# Altium PCB BatteryIot.PcbDoc (part 2 of 3)
Units mm, origin at the board's own origin, x right, y up, seen from the top; angles counter-clockwise.
Board outline 114 x 84 mm, 2 copper layers (Top Layer, Bottom Layer); 162 components, 97 nets, 548 pads, 135 vias.
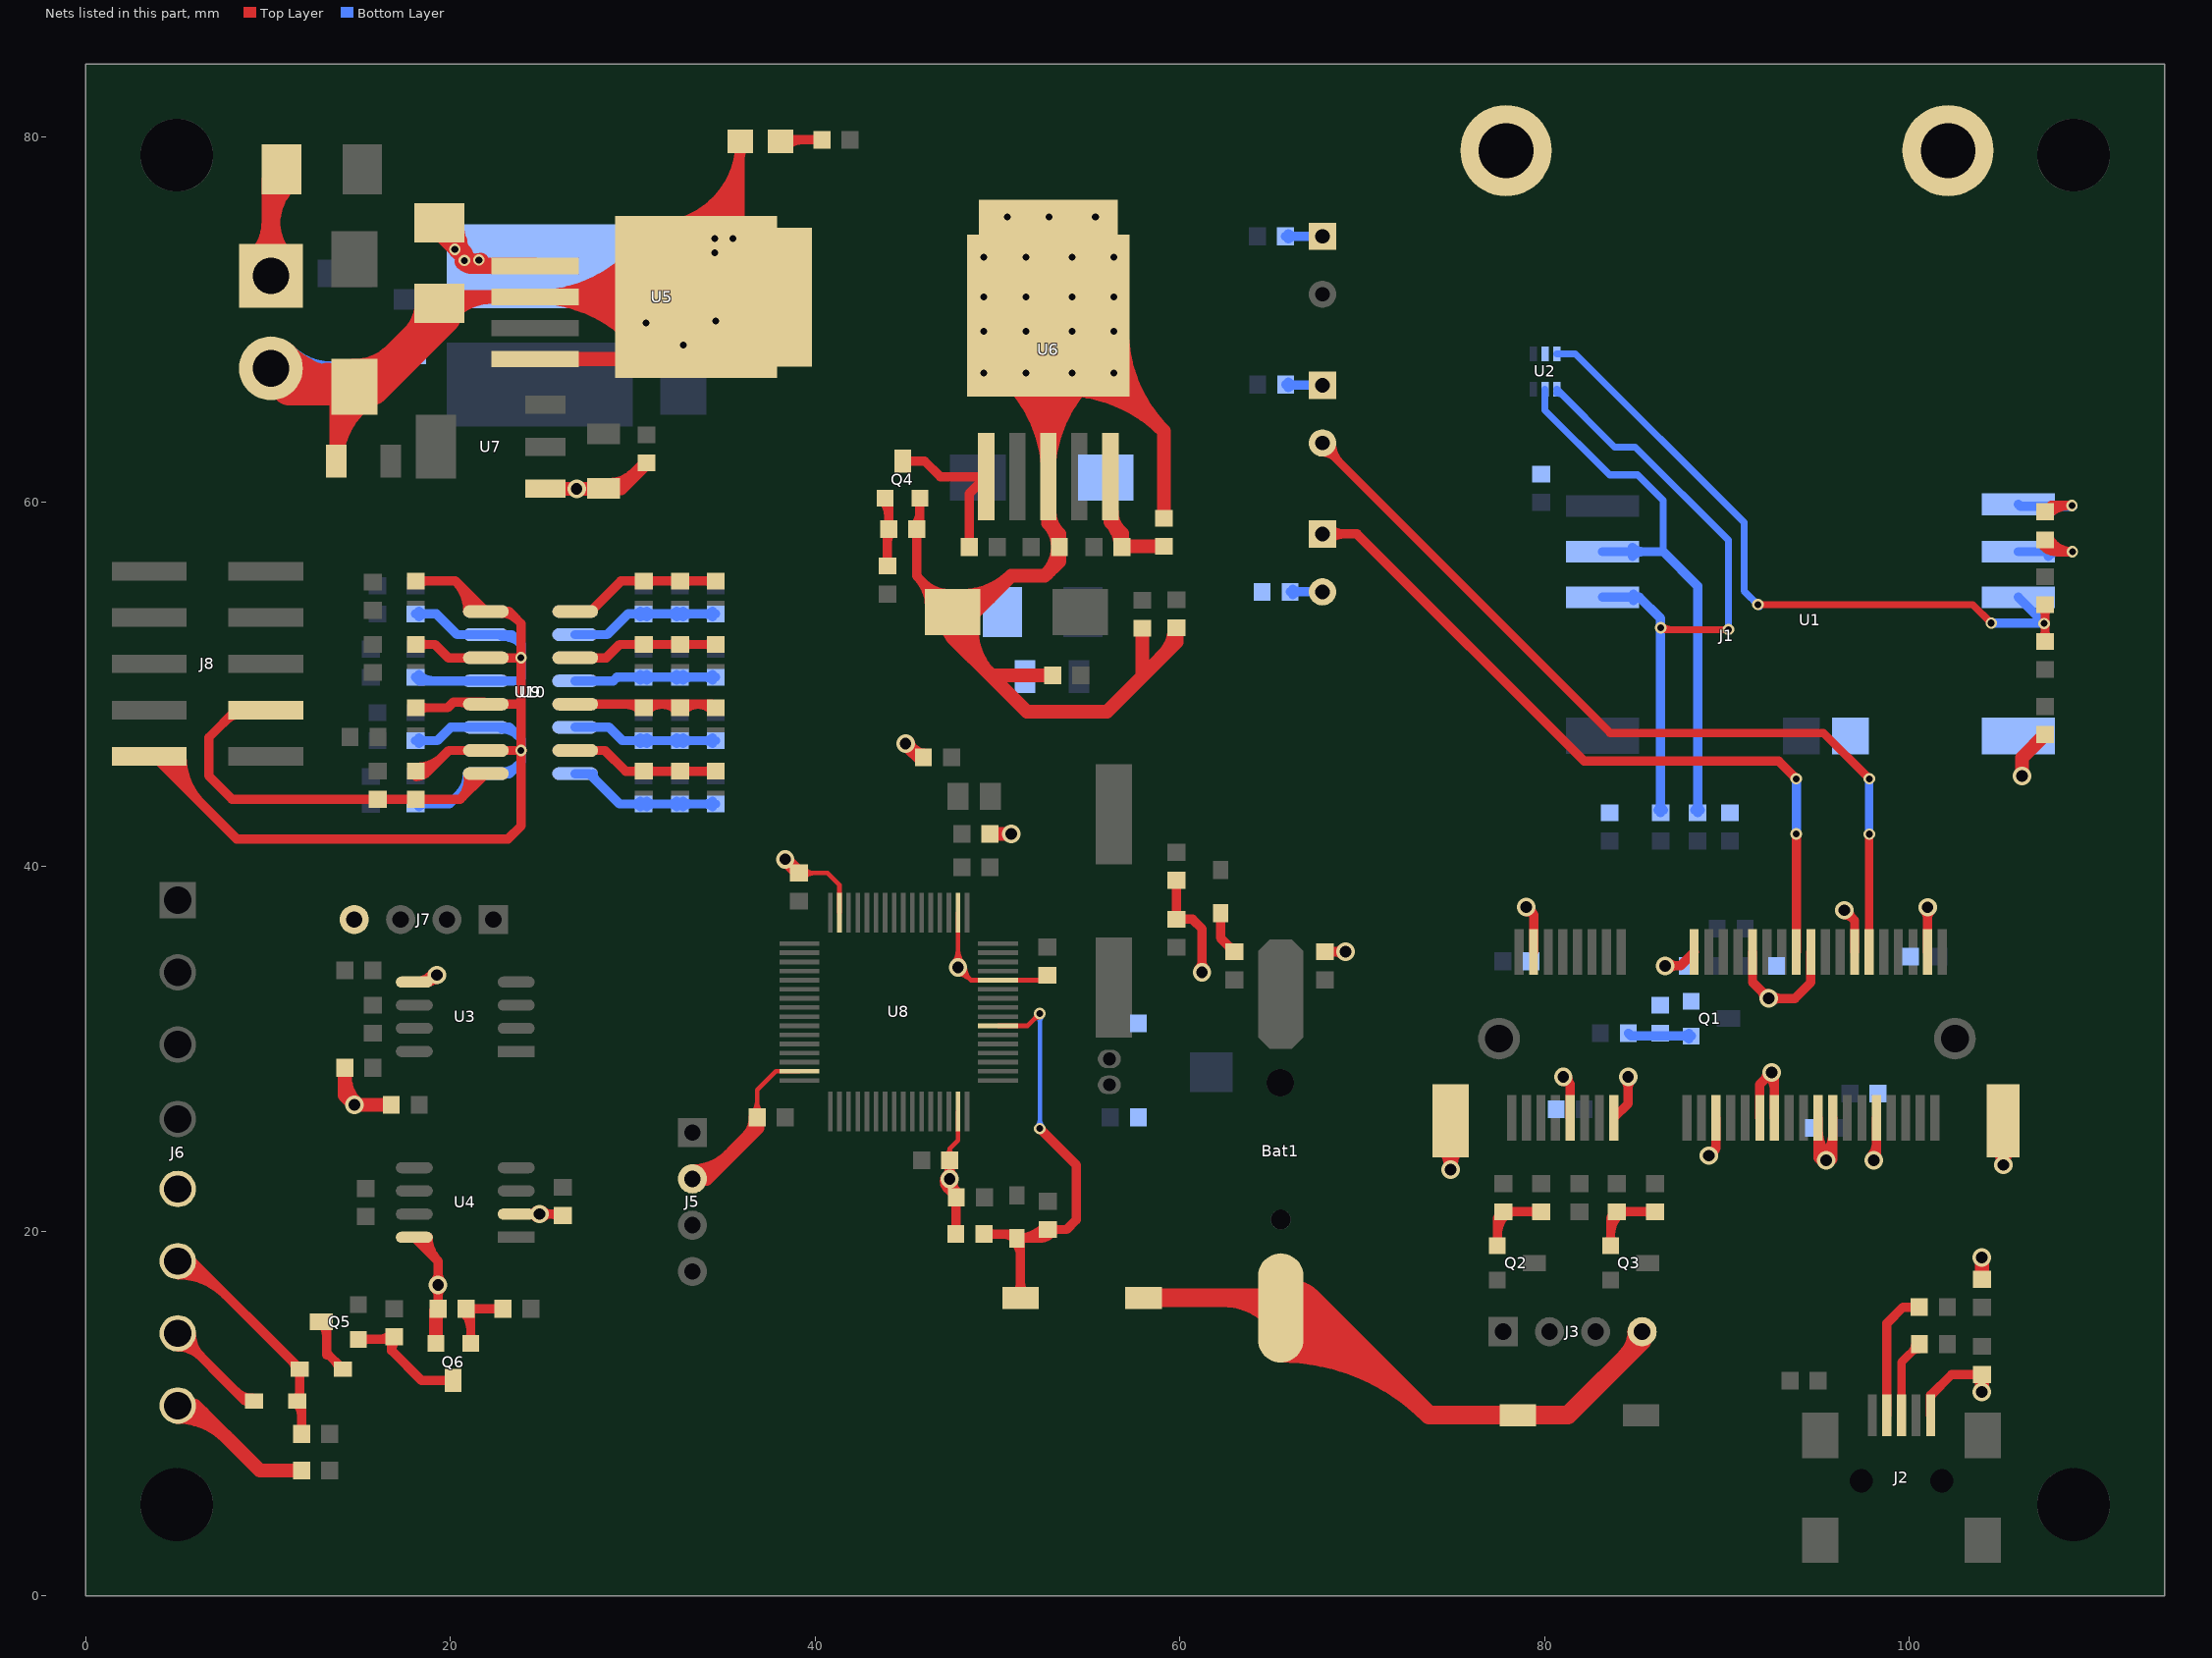
[diagram p2: the nets of this part, all layers, seen from the top]

## Via types
v1: diameter 0.635, hole 0.381, Top Layer to Bottom Layer, 99 vias
v2: diameter 1.016, hole 0.635, Top Layer to Bottom Layer, 31 vias
v3: diameter 0.889, hole 0.508, Top Layer to Bottom Layer, 5 vias

## Nets (pads, with @x,y where several pads share a name; then routed paths per layer and width w, separated by ;. In a path a pad name is that pad's centre, name@x,y a point inside that pad or via, vN(x,y) a via of type N, cw(c..) or ccw(c..) an arc to the next point about the centre after c; other vN are vias at no path point) (continued)
GND: B1.2 Bat1.2 Bt1.1 C1.2 C2.2 C3.2 C4.2 C5.2 C6.2 C8.2 C9.2 C10.2 C11.2 C12.2 C13.2 C14.2 C16.2 C17.2 C18.1 C19.2 C20.2 C21.2 C22.2 C23.2 C24.2 C25.2 C26.2 C27.2 C28.2 C29.2 C30.2 C31.2 C32.2 C33.2 C34.2 C35.2 C36.2 C37.2 C38.2 C39.1 C40.2 D2.1 D3.1 D6.1 J1.4 J1.9 J1.15 J1.18 J1.21 J1.26 J1.27 J1.29 J1.34 J1.35 J1.37 J1.40 J1.43 J1.50 J1.53 J1.54 J1.55 J1.56 J2.5 J3.4 J4.2 J5.2 J6.5 J6.8 J7.4 LED2.2 Q1.2 Q4.2 Q6.2 R5.2 R11.1 R12.1 R13.1 R18.2 R25.1 R26.1 R28.1 R31.1 R33.2 R38.2 U1.8 U2.2 U3.5 U4.2 U4.8 U5.3 U5.5 U6.3 U7.1 U8.12 U8.18 U8.31 U8.47 U8.63 | length 595.6
  Top Layer w0.254: C35.2@36.583,26.502 ccw(c36.006,27.079) 36.822,27.079 ccw(c37.638,27.079) C35.2@37.061,26.502 ; C35.2@36.822,26.238 36.822,27.729 37.851,28.758 U8.47@39.138,28.758 ; C34.2@39.116,39.632 40.683,39.632 41.338,38.977 U8.31@41.338,37.458 ; C34.2@39.38,39.393 cw(c39.957,38.816) 39.957,39.632 cw(c39.957,40.448) C34.2@39.38,39.871 ; R33.2@47.196,24.186 ccw(c46.984,24.518) 47.378,24.518 ; R33.2@47.378,23.876 47.378,24.518 ; R33.2@47.56,24.186 cw(c47.772,24.518) 47.378,24.518 ; v2@47.569,34.727 ccw(c46.918,35.378) 47.838,35.378 ccw(c48.758,35.378) v2@48.107,34.727 ; U8.63@47.838,26.558 47.838,24.978 47.378,24.518 ; v2@47.838,34.077 cw(c47.838,33.157) 48.488,33.808 cw(c49.139,34.458) v2@48.219,34.458 ; U8.18@47.838,37.458 v2(47.838,34.458) 48.538,33.758 U8.12@50.038,33.758 52.468,33.758 C40.2@52.738,34.028
  Top Layer w0.508: U4.8@18.023,19.658 19.324,18.357 ; U4.8@18.277,19.658 ccw(c18.89,19.658) 18.457,19.224 ; U3.5@18.734,33.706 ccw(c18.734,34.182) v2@19.071,33.845 ; U4.8@18.785,19.658 ccw(c20.625,19.658) 19.324,18.357 ; U3.5@18.823,33.702 ccw(c18.637,34.023) v2@19.008,34.031 ; v2@19.009,34.012 cw(c18.566,33.969) U3.5@18.881,33.655 ; v2@19.056,34.184 cw(c18.023,34.926) U3.5@18.023,33.655 U3.5@18.881,33.655 ; v2@19.145,16.866 cw(c18.711,16.432) 19.324,16.432 cw(c19.937,16.432) v2@19.504,16.866 ; v2@19.145,17.225 ccw(c18.711,17.659) 19.324,17.659 ccw(c19.937,17.659) v2@19.504,17.225 ; R31.1@19.175,15.908 ccw(c18.815,16.268) 19.324,16.268 ccw(c19.834,16.268) R31.1@19.473,15.908 ; v2@19.237,33.783 ccw(c19.195,33.341) U3.5@18.881,33.655 ; v2(19.262,34.036) U3.5@18.881,33.655 ; R31.1@19.324,15.734 19.324,18.357 ; U4.2@23.611,20.928 26.087,20.928 C14.2@26.162,20.853 ; v2@24.712,20.748 ccw(c24.279,20.315) 24.279,20.928 ccw(c24.279,21.541) v2@24.712,21.108 ; v2@25.072,20.748 cw(c25.505,20.315) 25.505,20.928 cw(c25.505,21.541) v2@25.072,21.108 ; 25.447,20.928 cw(c25.447,20.164) C14.2@25.988,20.704 ; U5.3@32.425,75.279 ccw(c31.263,79.757) LED2.2@35.889,79.758 35.889,73.635 U5.3@33.477,71.223 ; U5.3@32.552,74.788 ccw(c31.433,79.101) 35.889,79.101 ; U5.3@32.68,74.296 ccw(c31.604,78.444) 35.889,78.444 ; U5.3@32.808,73.804 ccw(c31.774,77.788) 35.889,77.788 ; U5.3@32.935,73.313 ccw(c31.944,77.131) 35.889,77.131 ; U5.3@33.063,72.821 ccw(c32.115,76.474) 35.889,76.474 ; U5.3@33.19,72.329 ccw(c32.285,75.818) 35.889,75.818 ; U5.3@33.318,71.837 ccw(c32.456,75.161) U5.3@35.889,75.161 ; U5.3@33.406,73.532 cw(c33.994,72.268) U5.3@34.471,73.578 ; U5.3@33.817,74.313 cw(c34.204,73.544) U5.3@34.473,74.362 ; U5.3@34.015,73.886 ccw(c33.557,74.666) U5.3@34.432,74.438 ; U5.3@34.224,73.412 ccw(c34.032,73.787) U5.3@34.433,73.657 ; U5.3@34.481,74.484 ccw(c34.307,75.37) U5.3@35.057,74.867 ; U5.3@34.556,74.429 cw(c35.409,74.523) U5.3@34.74,75.059 ; U5.3@34.557,73.64 cw(c36.013,73.692) U5.3@34.947,74.685 ; U5.3@34.973,74.145 cw(c35.492,73.621) U5.3@35.496,74.359 ; U5.3@35.324,73.476 ccw(c34.258,74.074) U5.3@35.435,74.405 ; U5.3@35.34,74.075 ccw(c34.977,74.358) U5.3@35.433,74.414 ; U5.3@35.452,74.467 ccw(c34.395,75.523) U5.3@35.889,75.523 ; U5.3@35.458,74.472 ccw(c34.755,75.388) U5.3@35.899,75.237 ; U5.3@35.46,74.37 cw(c34.876,73.542) U5.3@35.889,73.542 ; U5.3@35.461,74.475 ccw(c35.173,74.91) U5.3@35.684,74.806 ; U5.3@35.504,75.039 ccw(c36.238,74.804) U5.3@35.553,74.451 ; LED2.2@35.62,79.488 cw(c34.969,78.838) 35.889,78.838 cw(c36.809,78.838) LED2.2@36.159,79.488 ; U5.3@35.889,75.518 ccw(c37.773,75.518) U5.3@36.441,74.186 ; R28.1@45.424,58.311 cw(c45.063,57.951) 45.573,57.951 cw(c46.082,57.951) R28.1@45.722,58.311 ; R28.1@45.424,58.66 ccw(c44.654,59.43) 45.743,59.43 ; Q4.2@45.599,60.05 cw(c45.252,59.703) 45.743,59.703 cw(c46.233,59.703) Q4.2@45.886,60.05 ; Q4.2@45.743,60.193 45.743,58.655 cw(c45.573,58.655) R28.1@45.573,58.485 45.573,55.918 ; 45.986,55.506 ccw(c47.286,56.806) C24.2@47.286,54.967 ; C24.2@46.273,54.028 ccw(c43.865,54.211) 45.573,55.918 ; C24.2@46.355,55.136 cw(c45.319,54.1) C24.2@46.78,53.989 ; v2@47.152,22.976 ccw(c47.641,22.725) 47.252,22.336 ; v2@47.198,22.68 cw(c46.765,22.247) 47.378,22.247 cw(c47.991,22.247) v2@47.558,22.68 ; v2@47.198,23.04 ccw(c46.765,23.473) 47.378,23.473 ccw(c47.991,23.473) v2@47.558,23.04 ; R33.2@47.229,23.702 cw(c46.869,23.342) 47.378,23.342 cw(c47.887,23.342) R33.2@47.527,23.702 ; v2@47.243,23.075 ccw(c47.092,23.315) R33.2@47.366,23.388 ; v2@47.287,22.623 cw(c47.067,22.05) C37.2@47.66,22.208 ; v2@47.378,23.262 ccw(c49.137,23.262) C37.2@47.893,22.018 ; R33.2@47.378,23.876 47.378,22.21 C37.2@47.744,21.844 ; R33.2@47.39,23.388 ccw(c47.664,23.315) v2@47.513,23.075 ; C24.2@47.54,53.951 45.573,55.918 ; C33.2@47.569,20.012 ccw(c47.209,20.372) 47.719,20.372 ccw(c48.228,20.372) C33.2@47.868,20.012 ; v2@47.604,22.744 ccw(c48.29,22.39) C37.2@47.744,21.844 ; C33.2@47.719,19.837 47.719,21.819 C37.2@47.744,21.844 ; 47.719,21.248 cw(c48.315,21.248) C37.2@47.893,21.67 ; C30.2@59.668,37.249 ccw(c59.308,37.609) 59.817,37.609 ccw(c60.326,37.609) C30.2@59.966,37.249 ; C31.2@59.668,39.078 cw(c59.308,38.718) 59.817,38.718 cw(c60.326,38.718) C31.2@59.966,39.078 ; C31.2@59.817,39.227 C30.2@59.817,37.1 60.69,37.1 61.214,36.576 v2(61.214,34.186) ; C30.2@59.991,36.951 cw(c60.351,36.591) 60.351,37.1 cw(c60.351,37.609) C30.2@59.991,37.249 ; v2@61.034,34.366 ccw(c60.601,34.799) 61.214,34.799 ccw(c61.827,34.799) v2@61.394,34.366 ; C32.2@67.957,35.314 v2(69.088,35.314) ; C32.2@68.131,35.165 cw(c68.491,34.805) 68.491,35.314 cw(c68.491,35.823) C32.2@68.131,35.463 ; v2@68.908,35.134 ccw(c68.475,34.701) 68.475,35.314 ccw(c68.475,35.927) v2@68.908,35.494 ; v2(78.994,37.76) 79.4,37.354 ; v2@79.006,37.506 cw(c79.031,36.985) 79.4,37.354 ; v2@79.248,37.748 ccw(c79.769,37.723) 79.4,37.354 ; J1.4@79.4,35.302 79.4,37.354 ; v2(81.026,28.448) 81.4,28.074 ; v2@81.054,28.196 cw(c81.1,27.774) 81.4,28.074 ; v2@81.278,28.42 ccw(c81.7,28.374) 81.4,28.074 ; J1.9@81.4,26.202 81.4,28.074 ; J1.15@83.8,26.202 84.582,26.984 v2(84.582,28.448) ; v2@84.402,28.268 cw(c83.969,27.835) 84.582,27.835 cw(c85.195,27.835) v2@84.762,28.268 ; v2(86.614,34.544) 87.442,34.544 J1.18@88.2,35.302 ; v2@86.794,34.364 cw(c87.227,33.931) 87.227,34.544 cw(c87.227,35.157) v2@86.794,34.724 ; v2(89,24.13) 89.4,24.53 ; v2@89.015,24.384 ccw(c89.044,24.886) 89.4,24.53 ; v2@89.254,24.145 cw(c89.756,24.174) 89.4,24.53 ; J1.21@89.4,26.202 89.4,24.53 ; J1.26@91.4,35.302 91.4,33.644 v2(92.286,32.758) 93.726,32.758 94.6,33.632 J1.34@94.6,35.302 ; J1.27@91.8,26.202 91.8,28.046 v2(92.456,28.702) 92.6,28.558 J1.29@92.6,26.202 ; v2@92.032,32.758 ccw(c91.419,32.758) 91.852,33.192 ccw(c92.286,33.625) v2@92.286,33.012 ; v2@92.202,28.702 cw(c91.589,28.702) 92.022,28.268 cw(c92.456,27.835) v2@92.456,28.448 ; v2@92.276,28.522 cw(c91.495,27.741) 92.6,27.741 ; v2@92.466,32.578 cw(c92.899,32.145) 92.899,32.758 cw(c92.899,33.371) v2@92.466,32.938 ; 95,24.32 ccw(c95.882,24.32) v2@95.258,23.696 ; J1.35@95,25.547 ccw(c97.109,25.547) v2@95.618,24.056 ; J1.35@95,26.202 95,23.994 95.118,23.876 95.758,23.876 95.8,23.918 J1.37@95.8,26.202 ; v2@95.258,24.056 ccw(c93.951,25.363) J1.37@95.8,25.363 ; v2@96.436,37.338 cw(c96.436,36.725) 96.869,37.158 cw(c97.303,37.592) v2@96.69,37.592 ; v2(96.436,37.592) 97,37.028 J1.40@97,35.302 ; v2@97.864,24.056 ccw(c97.054,24.866) 98.2,24.866 ; v2(98.044,23.876) 98.2,24.032 J1.43@98.2,26.202 ; v2@100.82,37.574 cw(c100.387,37.141) 101,37.141 cw(c101.613,37.141) v2@101.18,37.574 ; J1.50@101,35.302 v2(101,37.754) v2@101.092,37.846 ; J2.5@101.164,10.799 cw(c101.606,10.799) 101.293,11.111 ; J2.5@101.168,9.899 101.168,10.986 102.315,12.133 R12.1@103.986,12.133 ; R12.1@103.812,11.984 ccw(c103.452,11.624) 103.452,12.133 ccw(c103.452,12.642) R12.1@103.812,12.282
  Top Layer w0.762: J6.8@5.055,9.807 cw(c5.055,6.047) 7.713,8.706 ; J6.8@5.055,10.569 cw(c5.055,8.649) 6.412,10.007 ; J6.8@5.993,10.426 9.561,6.858 R38.2@11.839,6.858 ; C19.2@13.75,62.106 cw(c17.947,62.106) C38.2@15.294,65.358 ; C19.2@13.75,62.23 13.75,65.319 C38.2@14.732,66.301 ; 13.75,63.711 cw(c16.638,63.711) C38.2@14.812,65.948 ; R18.2@14.216,28.476 ccw(c16.284,28.476) v2@14.822,27.014 ; R18.2@14.216,28.956 14.216,27.44 v2(14.732,26.924) C13.2@16.756,26.924 ; Q6.2@19.213,13.829 19.213,15.623 R31.1@19.324,15.734 ; 19.213,15.238 cw(c19.795,15.238) R31.1@19.384,15.65 ; D2.1@19.558,70.18 20.6,71.222 U5.3@24.638,71.222 ; D2.1@20.192,70.372 cw(c22.243,68.32) U5.3@22.243,71.222 ; 22.229,71.218 cw(c22.374,70.677) U5.3@22.653,71.162 ; U5.5@24.638,67.818 30.073,67.818 U5.3@33.476,71.222 ; U7.1@25.209,60.709 28.378,60.709 C39.1@28.403,60.734 29.359,60.734 C20.2@30.748,62.123 ; 27.952,71.222 ccw(c27.952,75.959) U5.3@31.549,72.876 ; 27.954,71.222 cw(c27.954,66.484) U5.3@31.55,69.569 ; C39.1@28.738,60.918 ccw(c28.738,62.861) 30.112,61.487 ; U5.3@30.03,69.855 ccw(c30.532,70.664) U5.3@30.748,69.737 ; U5.3@30.197,70.499 cw(c29.674,69.438) U5.3@30.794,69.819 ; U5.3@30.392,73.868 cw(c24.638,78.799) U5.3@24.638,71.222 ; U5.3@30.393,68.576 ccw(c24.638,63.639) U5.3@24.638,71.222 ; U5.3@30.671,69.8 ccw(c31.648,69.78) U5.3@30.942,69.103 ; U5.3@30.728,69.862 cw(c30.829,68.848) U5.3@31.548,69.57 ; U5.3@30.971,69.073 ccw(c26.296,65.062) 26.296,71.222 ccw(c26.295,77.379) U5.3@30.97,73.372 ; J5.2@33.274,22.86 34.036,22.86 36.822,25.646 C35.2@36.822,26.238 ; J5.2@33.274,23.279 ccw(c33.274,26.13) 35.29,24.114 ; U5.3@33.477,71.223 U5.3@33.476,71.222 ; 36.278,25.102 ccw(c35.166,26.213) C35.2@36.738,26.213 ; v2(38.362,40.386) C34.2@39.116,39.632 ; v2(44.958,46.736) 45.72,45.974 C21.2@45.941,45.974 ; v2@45.081,46.769 ccw(c45.884,46.984) 45.468,46.264 ; v2@45.081,46.767 ccw(c45.852,46.96) 45.455,46.272 ; 45.378,46.316 ccw(c45.941,46.879) C21.2@45.941,46.083 ; C24.2@47.168,53.144 cw(c46.899,52.561) 47.54,52.561 ; C24.2@47.174,54.085 ccw(c48.918,53.707) 47.656,52.445 ; C24.2@47.803,54.077 ccw(c47.948,56.349) 49.558,54.739 ; C24.2@47.851,54.838 ccw(c48.092,58.588) 50.749,55.931 ; C24.2@47.913,53.144 ccw(c48.182,52.561) 47.54,52.561 ; C24.2@47.919,53.924 ccw(c50.542,53.355) 48.644,51.458 ; C24.2@48.663,53.762 ccw(c52.165,53.004) 49.631,50.47 ; C36.2@49.589,41.781 50.531,41.781 v2@50.546,41.765 ; U6.3@50.142,67.121 cw(c45.21,61.368) U6.3@52.788,61.367 cw(c60.37,61.368) U6.3@55.433,67.122 ; U6.3@50.638,67.7 cw(c46.63,63.025) U6.3@52.788,63.025 ; U6.3@51.134,68.278 cw(c48.05,64.682) 52.788,64.682 ; U6.3@51.162,67.163 ccw(c51.568,67.56) U6.3@51.561,66.993 ; U6.3@51.501,67.075 ccw(c52.033,66.907) U6.3@51.538,66.65 ; 52.715,56.052 ccw(c51.286,57.481) C23.2@53.307,57.481 ; U6.3@52.787,70.207 U6.3@52.788,70.206 ; U6.3@52.788,63.026 cw(c58.948,63.026) U6.3@54.937,67.701 ; 52.788,64.683 cw(c57.525,64.683) U6.3@54.441,68.279 ; U6.3@52.857,59.417 ccw(c54.466,59.417) 53.328,58.279 ; U6.3@52.952,67.672 cw(c53.273,62.763) 56.752,66.242 cw(c60.231,69.721) U6.3@55.321,70.041 ; U6.3@53.002,66.912 cw(c53.419,60.529) 57.941,65.052 cw(c62.464,69.575) U6.3@56.082,69.992 ; C25.2@53.027,50.47 49.632,50.47 ; U6.3@53.052,66.151 cw(c53.565,58.296) 59.131,63.862 cw(c64.697,69.429) U6.3@56.842,69.942 ; C23.2@53.307,57.532 ccw(c51.534,57.566) 52.788,58.82 ; U6.3@53.441,69.552 ccw(c54.102,70.213) U6.3@54.102,69.279 ; U6.3@54.039,69.342 ccw(c54.973,69.342) U6.3@54.312,68.681 ; U6.3@55.59,66.984 ccw(c55.985,67.985) U6.3@56.413,66.998 ; U6.3@55.727,67.266 ccw(c56.388,67.927) U6.3@56.388,66.993 ; U6.3@56.026,67.364 ccw(c56.635,67.586) U6.3@56.361,66.998 ; U6.3@56.228,68.63 cw(c57.179,68.875) U6.3@56.333,69.374 ; U6.3@56.325,67.051 ccw(c57.49,67.149) U6.3@56.735,66.255 ; U6.3@56.325,67.056 ccw(c57.259,67.056) U6.3@56.598,66.395 ; U6.3@56.325,67.062 ccw(c56.999,67.001) U6.3@56.48,66.567 ; U6.3@56.441,67.021 ccw(c56.035,67.292) U6.3@56.514,67.387 ; C26.2@57.937,53.053 57.937,50.419 ; 59.08,51.561 ccw(c57.563,53.078) C27.2@59.708,53.078 ; R26.1@59.131,59.088 59.131,63.862 U6.3@52.788,70.206 ; C27.2@59.817,53.078 59.817,52.299 57.937,50.419 ; J1.56@74.412,24.614 cw(c73.356,23.558) 74.85,23.558 cw(c76.344,23.558) J1.56@75.288,24.614 ; v2(74.85,23.368) J1.56@74.85,26.052 ; v2(103.978,18.542) 103.986,18.534 R11.1@103.986,17.356 ; R12.1@103.986,12.133 103.986,11.208 v2@104.018,11.176 ; J1.55@104.783,24.585 cw(c103.897,23.699) 105.15,23.699 cw(c106.403,23.699) J1.55@105.517,24.585 ; J1.55@105.15,26.052 105.15,23.628 v2(105.156,23.622) ; v2(106.172,44.958) 106.172,45.958 C2.2@107.442,47.228 ; U5.3@24.638,71.222 U5.3@33.476,71.222 ; 47.54,52.561 C24.2@47.54,53.951 48.769,53.951 50.749,55.931 52.594,55.931 53.391,56.728 C23.2@53.391,57.506 53.391,58.217 52.788,58.82 ; 47.54,52.561 49.632,50.47 ; 49.632,50.47 51.613,48.489 56.007,48.489 57.937,50.419 ; 52.788,58.82 U6.3@52.788,61.367 U6.3@52.788,70.206
  Top Layer w1.016: Bt1.1@58.01,16.332 65.283,16.332 65.303,16.352 67.214,16.352 ; 62.402,16.332 cw(c62.402,12.647) Bat1.2@65.007,15.253 ; Bat1.2@65.532,13.286 cw(c65.532,1.822) 73.638,9.928 ; Bat1.2@65.532,14.302 cw(c65.532,5.291) 71.904,11.662 ; Bat1.2@65.532,15.318 cw(c65.532,8.76) 70.169,13.397 ; Bat1.2@65.532,16.334 cw(c65.532,12.229) 68.435,15.131 ; Bat1.2@65.688,16.802 cw(c66.038,15.176) 67.214,16.352 ; Bat1.2@66.252,15.599 cw(c67.214,15.361) 67.214,16.352 ; 84.486,13.112 ccw(c83.121,14.478) J3.4@85.052,14.478 ; J3.4@85.344,14.478 85.344,13.97 81.273,9.899 B1.2@78.533,9.899 73.667,9.899 67.214,16.352
  Top Layer w2.032: J4.2@10.16,67.31 11.169,66.301 C38.2@14.732,66.301 15.679,66.301 D2.1@19.558,70.18 ; J4.2@10.679,67.829 ccw(c14.368,71.518) C38.2@14.368,66.301 ; 13.26,66.598 ccw(c13.719,68.31) C38.2@14.605,66.775 ; C38.2@14.732,66.809 ccw(c14.732,70.321) 17.216,67.838 ; 18.206,68.828 ccw(c16.168,70.866) D2.1@19.05,70.866
  Bottom Layer w0.762: C16.2@32.766,72.151 cw(c32.766,67.875) C18.1@35.789,70.899 ; C16.2@32.766,72.913 cw(c32.766,70.477) 34.488,72.2 ; C16.2@32.766,73.294 33.394,73.294 C18.1@36.068,70.62 ; C18.1@35.685,70.959 cw(c35.388,70.445) C18.1@35.962,70.598
  Bottom Layer w1.016: D3.1@14.224,66.929 16.603,66.929 C17.2@17.78,68.106 ; 17.111,67.437 ccw(c16.442,68.106) C17.2@17.388,68.106
  Bottom Layer w1.524: J4.2@10.16,67.31 10.541,66.929 D3.1@14.224,66.929 ; J4.2@10.859,68.009 ccw(c13.465,70.615) D3.1@13.465,66.929
  other v1: 49.259,67.056 51.562,67.056 54.102,67.056 56.388,67.056 32.766,68.58 49.259,69.342 51.562,69.342 54.102,69.342 56.388,69.342 30.734,69.799 34.544,69.901 49.259,71.223 51.562,71.223 54.102,71.223 56.388,71.223 49.259,73.406 51.562,73.406 54.102,73.406 56.388,73.406 34.493,73.638 34.493,74.422 35.496,74.422 50.529,75.616 52.832,75.616 55.372,75.616
  other v2: 103.978,11.176 19.324,17.046 24.892,20.928 47.378,22.86 95.438,23.876 50.749,41.781 26.924,60.706
GND_OUT: C42.1 C44.1 C46.1 C48.1 C50.1 C52.1 C54.1 C56.1 J8.10 U9.9 U9.11 U9.13 U9.15 U10.9 U10.11 U10.13 U10.15 | length 110.7
  Top Layer w0.508: J8.10@3.493,46.025 3.759,46.025 8.28,41.504 23.165,41.504 23.876,42.215 v1(23.876,46.355) ; J8.10@3.765,46.025 ccw(c3.777,46.025) J8.10@3.768,46.016 ; J8.10@4.273,46.025 ccw(c5.512,46.025) 4.635,45.149 ; J8.10@4.781,46.025 ccw(c7.246,46.025) 5.503,44.281 ; J8.10@5.289,46.025 ccw(c8.981,46.025) 6.37,43.414 ; C42.1@18.108,45.22 18.779,45.22 19.914,46.355 U9.15@21.948,46.355 v1(23.876,46.355) ; C44.1@18.108,48.694 19.85,48.694 20.153,48.997 21.846,48.997 U9.13@21.948,48.895 23.876,48.895 ; C46.1@18.108,52.168 19.155,52.168 19.888,51.435 U9.11@21.948,51.435 v1(23.876,51.435) ; C48.1@18.108,55.642 20.281,55.642 ; C42.1@18.133,44.923 ccw(c18.133,45.765) 18.728,45.17 ; C42.1@18.133,45.431 ccw(c18.133,47.5) 19.595,46.037 ; C42.1@18.282,45.071 cw(c18.642,44.711) 18.642,45.22 cw(c18.642,45.729) C42.1@18.282,45.369 ; C44.1@18.282,48.545 cw(c18.642,48.185) 18.642,48.694 cw(c18.642,49.203) C44.1@18.282,48.843 ; C46.1@18.282,52.019 cw(c18.642,51.659) 18.642,52.168 cw(c18.642,52.677) C46.1@18.282,52.317 ; C48.1@18.282,55.493 cw(c18.642,55.133) 18.642,55.642 cw(c18.642,56.151) C48.1@18.282,55.791 ; 20.571,48.997 cw(c20.571,48.418) U9.13@20.98,48.827 ; U9.9@20.952,53.977 ccw(c18.66,54.021) 20.281,55.642 ; 21.125,54.798 cw(c20.316,53.989) U9.9@21.46,53.967 ; U9.9@22.848,53.879 cw(c22.848,52.759) 23.64,53.551 ; 20.281,55.642 U9.9@21.948,53.975 23.216,53.975 23.876,53.315 v1(23.876,51.435) ; v1(23.876,46.355) 23.927,46.355 23.876,46.406 23.876,48.895 ; 23.876,48.895 v1(23.876,51.435)
  Bottom Layer w0.508: C56.1@18.094,43.418 19.948,43.418 21.615,45.085 U10.9@21.934,45.085 23.241,45.085 23.876,45.72 v1(23.876,46.355) 23.876,46.99 23.241,47.625 U10.11@21.934,47.625 20.015,47.625 19.282,46.892 C54.1@18.094,46.892 ; C52.1@18.094,50.366 18.295,50.165 U10.13@21.934,50.165 23.749,50.165 23.876,50.292 v1(23.876,51.435) 23.876,52.197 23.368,52.705 U10.15@21.934,52.705 20.371,52.705 19.236,53.84 C50.1@18.094,53.84 ; C56.1@18.268,43.269 cw(c18.628,42.909) 18.628,43.418 cw(c18.628,43.927) C56.1@18.268,43.567 ; C54.1@18.268,46.743 cw(c18.628,46.383) 18.628,46.892 cw(c18.628,47.401) C54.1@18.268,47.041 ; C52.1@18.268,50.515 ccw(c19.114,51.361) 19.114,50.165 ; C50.1@18.268,53.691 cw(c18.628,53.331) 18.628,53.84 cw(c18.628,54.349) C50.1@18.268,53.989 ; 20.459,43.929 ccw(c19.303,45.085) U10.9@20.938,45.085 ; U10.9@21.326,44.796 ccw(c21.037,45.085) U10.9@21.446,45.085 ; U10.9@22.834,45.181 ccw(c22.834,46.395) 23.693,45.537 ; U10.11@22.834,47.529 cw(c22.834,46.315) 23.693,47.173 ; U10.15@22.837,52.609 cw(c22.88,51.201) 23.876,52.197
LED_WWAN: J1.42 LED1.2 | length 49.2
  Top Layer w0.457: LED1.2@67.818,62.693 cw(c67.818,61.725) 68.502,62.409 ; LED1.2@67.818,63.214 67.818,63.094 83.591,47.32 95.283,47.32 v1(97.8,44.803) ; LED1.2@68.339,63.214 ccw(c69.889,63.214) 68.793,62.118 ; J1.42@97.8,35.302 v1(97.8,41.765)
  Bottom Layer w0.457: v1(97.8,41.765) v1(97.8,44.803)
NetC7_2: C7.2 Q2.1 R9.2 | length 7.6
  Top Layer w0.508: Q2.1@77.269,19.348 ccw(c76.922,19.695) 77.413,19.695 ccw(c77.903,19.695) Q2.1@77.556,19.348 ; Q2.1@77.413,19.204 77.413,20.724 C7.2@77.744,21.055 R9.2@79.812,21.055 ; 77.413,19.806 cw(c78.968,19.806) C7.2@77.868,20.906 ; C7.2@77.918,20.906 cw(c78.278,20.546) 78.278,21.055 cw(c78.278,21.564) C7.2@77.918,21.204 ; R9.2@79.638,20.906 ccw(c79.278,20.546) 79.278,21.055 ccw(c79.278,21.564) R9.2@79.638,21.204
NetC15_1: C15.1 Q3.1 R36.1 | length 7.7
  Top Layer w0.508: Q3.1@83.479,19.348 ccw(c83.132,19.695) 83.623,19.695 ccw(c84.113,19.695) Q3.1@83.766,19.348 ; Q3.1@83.623,19.204 83.623,20.724 R36.1@83.954,21.055 C15.1@86.062,21.055 ; 83.623,19.806 cw(c85.178,19.806) R36.1@84.078,20.906 ; R36.1@84.128,20.906 cw(c84.488,20.546) 84.488,21.055 cw(c84.488,21.564) R36.1@84.128,21.204 ; C15.1@85.888,20.906 ccw(c85.528,20.546) 85.528,21.055 ccw(c85.528,21.564) C15.1@85.888,21.204
NetC41_1: C41.1 R40.1 R41.2 U9.2 | length 12.2
  Top Layer w0.508: U9.2@26.848,46.355 28.473,46.355 29.608,45.22 R41.2@34.558,45.22 ; C41.1@30.433,45.071 ccw(c30.073,44.711) 30.073,45.22 ccw(c30.073,45.729) C41.1@30.433,45.369 ; C41.1@30.781,45.071 cw(c31.142,44.711) 31.142,45.22 cw(c31.142,45.729) C41.1@30.781,45.369 ; R40.1@32.43,45.071 ccw(c32.069,44.711) 32.069,45.22 ccw(c32.069,45.729) R40.1@32.43,45.369 ; R40.1@32.778,45.071 cw(c33.138,44.711) 33.138,45.22 cw(c33.138,45.729) R40.1@32.778,45.369 ; R41.2@34.384,45.071 ccw(c34.023,44.711) 34.023,45.22 ccw(c34.023,45.729) R41.2@34.384,45.369
NetC43_1: C43.1 R43.1 R44.2 U9.4 | length 12.5
  Top Layer w0.508: U9.4@26.848,48.895 34.357,48.895 R44.2@34.558,48.694 ; 29.588,48.895 cw(c29.588,47.699) C43.1@30.433,48.545 ; C43.1@30.781,48.545 cw(c31.627,47.699) 31.627,48.895 ; 31.584,48.895 cw(c31.584,47.699) R43.1@32.43,48.545 ; R43.1@32.778,48.545 cw(c33.623,47.699) 33.623,48.895 ; 33.538,48.895 cw(c33.538,47.699) R44.2@34.384,48.545
NetC45_1: C45.1 R46.1 R47.2 U9.6 | length 12
  Top Layer w0.508: U9.6@26.848,51.435 28.55,51.435 29.283,52.168 R47.2@34.558,52.168 ; C45.1@30.433,52.019 ccw(c30.073,51.659) 30.073,52.168 ccw(c30.073,52.677) C45.1@30.433,52.317 ; C45.1@30.781,52.019 cw(c31.142,51.659) 31.142,52.168 cw(c31.142,52.677) C45.1@30.781,52.317 ; R46.1@32.43,52.019 ccw(c32.069,51.659) 32.069,52.168 ccw(c32.069,52.677) R46.1@32.43,52.317 ; R46.1@32.778,52.019 cw(c33.138,51.659) 33.138,52.168 cw(c33.138,52.677) R46.1@32.778,52.317 ; R47.2@34.384,52.019 ccw(c34.023,51.659) 34.023,52.168 ccw(c34.023,52.677) R47.2@34.384,52.317
NetC47_1: C47.1 R49.1 R50.2 U9.8 | length 12.4
  Top Layer w0.508: U9.8@26.848,53.975 27.686,53.975 29.353,55.642 R50.2@34.558,55.642 ; C47.1@30.433,55.493 ccw(c30.073,55.133) 30.073,55.642 ccw(c30.073,56.151) C47.1@30.433,55.791 ; C47.1@30.781,55.493 cw(c31.142,55.133) 31.142,55.642 cw(c31.142,56.151) C47.1@30.781,55.791 ; R49.1@32.43,55.493 ccw(c32.069,55.133) 32.069,55.642 ccw(c32.069,56.151) R49.1@32.43,55.791 ; R49.1@32.778,55.493 cw(c33.138,55.133) 33.138,55.642 cw(c33.138,56.151) R49.1@32.778,55.791 ; R50.2@34.384,55.493 ccw(c34.023,55.133) 34.023,55.642 ccw(c34.023,56.151) R50.2@34.384,55.791
NetC49_1: C49.1 R52.1 R53.2 U10.2 | length 12.2
  Bottom Layer w0.508: U10.2@26.834,52.705 28.6,52.705 29.735,53.84 R53.2@34.544,53.84 ; C49.1@30.419,53.691 ccw(c30.059,53.331) 30.059,53.84 ccw(c30.059,54.349) C49.1@30.419,53.989 ; C49.1@30.768,53.691 cw(c31.128,53.331) 31.128,53.84 cw(c31.128,54.349) C49.1@30.768,53.989 ; R52.1@32.416,53.691 ccw(c32.056,53.331) 32.056,53.84 ccw(c32.056,54.349) R52.1@32.416,53.989 ; R52.1@32.764,53.691 cw(c33.124,53.331) 33.124,53.84 cw(c33.124,54.349) R52.1@32.764,53.989 ; R53.2@34.37,53.691 ccw(c34.01,53.331) 34.01,53.84 ccw(c34.01,54.349) R53.2@34.37,53.989
NetC51_1: C51.1 R55.1 R56.2 U10.4 | length 11.8
  Bottom Layer w0.508: U10.4@26.834,50.165 28.933,50.165 29.134,50.366 R56.2@34.544,50.366 ; C51.1@30.419,50.217 ccw(c30.059,49.857) 30.059,50.366 ccw(c30.059,50.875) C51.1@30.419,50.515 ; C51.1@30.768,50.217 cw(c31.128,49.857) 31.128,50.366 cw(c31.128,50.875) C51.1@30.768,50.515 ; R55.1@32.416,50.217 ccw(c32.056,49.857) 32.056,50.366 ccw(c32.056,50.875) R55.1@32.416,50.515 ; R55.1@32.764,50.217 cw(c33.124,49.857) 33.124,50.366 cw(c33.124,50.875) R55.1@32.764,50.515 ; R56.2@34.37,50.217 ccw(c34.01,49.857) 34.01,50.366 ccw(c34.01,50.875) R56.2@34.37,50.515
NetC53_1: C53.1 R58.1 R59.2 U10.6 | length 12
  Bottom Layer w0.508: U10.6@26.834,47.625 28.702,47.625 29.435,46.892 R59.2@34.544,46.892 ; C53.1@30.419,46.743 ccw(c30.059,46.383) 30.059,46.892 ccw(c30.059,47.401) C53.1@30.419,47.041 ; C53.1@30.768,46.743 cw(c31.128,46.383) 31.128,46.892 cw(c31.128,47.401) C53.1@30.768,47.041 ; R58.1@32.416,46.743 ccw(c32.056,46.383) 32.056,46.892 ccw(c32.056,47.401) R58.1@32.416,47.041 ; R58.1@32.764,46.743 cw(c33.124,46.383) 33.124,46.892 cw(c33.124,47.401) R58.1@32.764,47.041 ; R59.2@34.37,46.743 ccw(c34.01,46.383) 34.01,46.892 ccw(c34.01,47.401) R59.2@34.37,47.041
NetC55_1: C55.1 R61.1 R62.2 U10.8 | length 12.8
  Bottom Layer w0.508: U10.8@26.834,45.085 27.61,45.085 29.277,43.418 R62.2@34.544,43.418 ; U10.8@27.83,45.085 ccw(c28.362,45.085) 27.986,44.709 ; C55.1@30.419,43.269 ccw(c30.059,42.909) 30.059,43.418 ccw(c30.059,43.927) C55.1@30.419,43.567 ; C55.1@30.768,43.269 cw(c31.128,42.909) 31.128,43.418 cw(c31.128,43.927) C55.1@30.768,43.567 ; R61.1@32.416,43.269 ccw(c32.056,42.909) 32.056,43.418 ccw(c32.056,43.927) R61.1@32.416,43.567 ; R61.1@32.764,43.269 cw(c33.124,42.909) 33.124,43.418 cw(c33.124,43.927) R61.1@32.764,43.567 ; R62.2@34.37,43.269 ccw(c34.01,42.909) 34.01,43.418 ccw(c34.01,43.927) R62.2@34.37,43.567
NetD1_1: D1.1 J4.1 | length 13.4
  Top Layer w1.016: J4.1@9.282,73.268 ccw(c7.162,75.388) 10.16,75.388 ccw(c13.158,75.388) J4.1@11.038,73.268 ; J4.1@10.16,72.39 10.16,77.648 D1.1@10.744,78.232 ; 10.16,75.15 cw(c13.534,75.15) D1.1@11.148,77.536
NetD2_2: D2.2 L1.1 U5.2 | length 13
  Top Layer w0.889: D2.2@19.558,74.6 21.235,72.923 ; v1@20.271,73.962 cw(c20.086,73.12) 20.812,73.584 ; D2.2@20.332,75.256 ccw(c23.422,75.111) 21.235,72.923 ; v1@20.346,73.763 ccw(c19.76,74.193) D2.2@20.478,74.303 ; v1@20.654,73.504 ccw(c21.565,74.414) v1@21.565,73.127 ; v1@21.475,73.164 ccw(c22.055,73.744) 22.055,72.923 ; v1@21.678,73.196 cw(c21.235,73.42) 21.235,72.923 ; U5.2@24.638,72.923 21.235,72.923 ; v1@20.687,73.138 ccw(c21.206,73.657) 21.206,72.923 cw(c21.206,73.657) v1@20.687,73.138
  other v1: 20.777,73.228 21.565,73.254 20.244,73.838
NetD7_2: D7.2 R34.1 | length 3.2
  Top Layer w0.508: D7.2@62.23,37.428 62.23,36.076 R34.1@62.992,35.314 ; R34.1@62.589,35.717 cw(c62.186,35.314) R34.1@62.756,35.314 ; R34.1@62.649,35.657 ccw(c62.967,35.974) R34.1@62.967,35.525
NetD9_1: D9.1 Q5.3 | length 4.3
  Top Layer w0.508: Q5.3@12.925,15.021 13.208,14.738 13.208,13.208 13.329,13.208 D9.1@14.105,12.432 ; Q5.3@12.959,14.878 cw(c12.359,14.277) 13.208,14.277 ; 13.685,12.852 cw(c13.265,12.432) D9.1@13.859,12.432
NetD9_2: D9.2 D10.2 J6.6 R37.1 | length 20
  Top Layer w0.508: J6.6@5.055,17.6 cw(c5.055,13.924) 7.654,16.523 ; J6.6@5.055,18.108 cw(c5.055,15.659) 6.787,17.391 ; J6.6@5.055,18.346 5.831,18.346 D9.2@11.745,12.432 ; 11.325,12.852 cw(c10.905,12.432) D9.2@11.499,12.432 ; D10.2@11.565,10.554 cw(c10.904,9.893) 11.839,9.893 ; D10.2@11.565,10.782 ccw(c11.131,11.216) 11.745,11.216 ; R37.1@11.69,9.05 ccw(c11.33,9.41) 11.839,9.41 ccw(c12.349,9.41) R37.1@11.988,9.05 ; D9.2@11.715,12.401 11.745,12.371 11.745,10.654 11.839,10.56 R37.1@11.839,8.876
NetD10_1: D10.1 J6.7 | length 9.6
  Top Layer w0.508: J6.7@5.055,13.64 cw(c5.055,11.839) 6.328,13.112 cw(c7.602,14.386) J6.7@5.801,14.386 ; J6.7@5.055,14.386 8.773,10.668 D10.1@9.234,10.668 ; 8.232,11.209 ccw(c9.149,12.126) D10.1@9.149,10.829
NetJ1_32: J1.32 LED4.1 | length 42.9
  Top Layer w0.508: LED4.1@67.818,58.23 69.71,58.23 82.169,45.771 92.833,45.771 v1(93.8,44.803) ; LED4.1@68.169,57.879 cw(c69.015,57.032) 69.015,58.23 cw(c69.015,59.427) LED4.1@68.169,58.58 ; J1.32@93.8,35.302 v1(93.8,41.781)
  Bottom Layer w0.508: v1(93.8,41.781) v1(93.8,44.803)
NetJ2_2: J2.2 R16.1 | length 8
  Top Layer w0.508: J2.2@98.768,9.899 98.768,14.942 99.65,15.824 R16.1@100.541,15.824 ; R16.1@100.392,15.675 ccw(c100.032,15.315) 100.032,15.824 ccw(c100.032,16.333) R16.1@100.392,15.973
NetJ2_3: J2.3 R14.1 | length 5.2
  Top Layer w0.457: J2.3@99.568,9.899 99.568,12.811 R14.1@100.549,13.792 ; R14.1@100.103,13.346 cw(c100.549,12.9) R14.1@100.549,13.531 ; R14.1@100.163,13.406 ccw(c99.802,13.767) R14.1@100.313,13.767
NetLED1_1: LED1.1 R17.2 | length 2.8
  Bottom Layer w0.508: R17.2@65.802,66.421 65.834,66.389 LED1.1@67.818,66.389 ; R17.2@65.951,66.247 cw(c66.295,65.903) 66.295,66.389 ; R17.2@65.951,66.545 ccw(c66.328,66.922) 66.328,66.389
NetLED2_1: LED2.1 R22.1 | length 4.6
  Top Layer w0.508: LED2.1@38.099,79.758 38.187,79.846 R22.1@40.378,79.846 ; LED2.1@38.434,79.488 cw(c39.296,78.626) 39.296,79.846 ; LED2.1@38.434,80.027 ccw(c38.872,80.465) 38.872,79.846 ; R22.1@40.229,79.696 ccw(c39.869,79.336) 39.869,79.846 ccw(c39.869,80.355) R22.1@40.229,79.995
NetLED3_1: LED3.1 R32.2 | length 2.8
  Bottom Layer w0.508: R32.2@65.794,74.549 LED3.1@67.818,74.549 ; R32.2@65.943,74.4 cw(c66.303,74.04) 66.303,74.549 cw(c66.303,75.058) R32.2@65.943,74.698
NetLED4_2: LED4.2 R13.2 | length 2.6
  Bottom Layer w0.508: R13.2@66.048,55.054 LED4.2@67.818,55.054 ; R13.2@66.197,54.905 cw(c66.557,54.545) 66.557,55.054 cw(c66.557,55.564) R13.2@66.197,55.204
NetQ1_1: Q1.1 R4.2 R5.1 | length 4.3
  Bottom Layer w0.508: R4.2@84.59,30.849 84.744,30.695 Q1.1@88.048,30.695 ; Q1.1@87.904,30.551 ccw(c87.557,30.204) 87.557,30.695 ccw(c87.557,31.185) Q1.1@87.904,30.838
NetQ4_1: Q4.1 R27.1 R28.2 | length 6.9
  Top Layer w0.508: Q4.1@43.694,60.05 cw(c42.876,59.232) 44.033,59.232 ; R27.1@43.818,56.621 ccw(c43.458,56.982) 43.967,56.982 ccw(c44.477,56.982) R27.1@44.117,56.621 ; Q4.1@43.838,60.193 cw(c43.838,59.998) 44.033,59.998 R28.2@44.033,58.485 43.967,58.42 R27.1@43.967,56.472 ; R28.2@43.884,58.66 ccw(c43.523,59.02) 44.033,59.02 ccw(c44.542,59.02) R28.2@44.182,58.66 ; 43.967,57.793 cw(c44.7,57.793) R28.2@44.182,58.311
NetQ4_3: Q4.3 R23.1 U6.1 | length 12.2
  Top Layer w0.508: Q4.3@44.803,62.225 46.004,62.225 46.862,61.367 U6.1@49.384,61.367 48.447,60.43 R23.1@48.447,57.506 ; Q4.3@44.947,62.082 cw(c45.293,61.735) 45.293,62.225 cw(c45.293,62.716) Q4.3@44.947,62.369 ; R23.1@48.298,57.68 ccw(c47.938,58.04) 48.447,58.04 ccw(c48.957,58.04) R23.1@48.596,57.68 ; U6.1@49.188,61.367 cw(c48.715,61.367) 49.05,61.033 cw(c49.384,60.698) U6.1@49.384,61.171 ; U6.1@49.246,61.229 ccw(c48.911,60.894) 48.911,61.367 ccw(c48.911,61.841) U6.1@49.246,61.506
NetQ5_1: Q5.1 Q6.3 R29.2 | length 9.5
  Top Layer w0.508: Q5.1@14.957,14.056 16.781,14.056 16.781,13.445 18.429,11.797 Q6.3@20.153,11.797 ; Q5.1@15.101,13.912 cw(c15.448,13.565) 15.448,14.056 cw(c15.448,14.547) Q5.1@15.101,14.2 ; 16.04,14.056 ccw(c16.04,15.064) R29.2@16.753,14.351 ; 16.781,13.435 cw(c17.621,13.435) R29.2@17.047,14.048 ; Q6.3@20.009,11.653 ccw(c19.662,11.306) 19.662,11.797 ccw(c19.662,12.288) Q6.3@20.009,11.941
NetQ6_1: Q6.1 R30.1 R31.2 | length 7.5
  Top Layer w0.508: R31.2@20.715,15.56 cw(c19.742,14.586) 21.118,14.586 ; Q6.1@20.974,13.973 ccw(c20.628,14.32) 21.118,14.32 ccw(c21.609,14.32) Q6.1@21.262,13.973 ; R31.2@21.013,15.585 cw(c21.374,15.225) 21.374,15.734 cw(c21.374,16.243) R31.2@21.013,15.883 ; Q6.1@21.118,13.829 21.118,15.48 R31.2@20.864,15.734 R30.1@22.88,15.734 ; R30.1@22.731,15.585 ccw(c22.371,15.225) 22.371,15.734 ccw(c22.371,16.243) R30.1@22.731,15.883
NetR2_2: R2.2 R3.1 U1.6 U2.3 | length 41.1
  Top Layer w0.381: v1(91.694,54.356) 103.476,54.356 v1(104.492,53.34) v1@104.517,53.315
  Top Layer w0.508: R3.1@107.293,52.481 ccw(c106.933,52.841) 107.442,52.841 ccw(c107.951,52.841) R3.1@107.591,52.481 ; R2.2@107.293,54.199 cw(c106.933,53.839) 107.442,53.839 cw(c107.951,53.839) R2.2@107.591,54.199 ; R3.1@107.442,52.332 R2.2@107.442,54.348
  Bottom Layer w0.381: U2.3@80.672,68.106 81.69,68.106 90.932,58.864 90.932,55.11 v1@91.8,54.242 ; 91.464,54.578 ccw(c91.694,54.809) v1@91.694,54.483
  Bottom Layer w0.508: v1(104.492,53.34) 107.366,53.34 v1(107.391,53.315) 107.391,53.337 U1.6@105.974,54.754
NetR6_1: R6.1 U1.2 U2.5 | length 33.1
  Bottom Layer w0.381: U2.5@80.022,66.166 80.022,65.012 83.566,61.468 85.11,61.468 86.51,60.068 86.51,57.254
  Bottom Layer w0.508: U1.2@83.174,57.254 86.51,57.254 88.392,55.372 R6.1@88.392,42.934 ; U1.2@84.819,57.009 cw(c85.409,56.419) 85.409,57.254 cw(c85.409,58.089) U1.2@84.819,57.499 ; R6.1@88.243,43.083 ccw(c87.883,43.443) 88.392,43.443 ccw(c88.901,43.443) R6.1@88.541,43.083
NetR7_1: R7.1 U1.3 U2.4 | length 38.3
  Top Layer w0.381: v1(86.36,53.086) 86.462,52.984 v1(90.08,52.984) ; v1@86.45,53.176 ccw(c86.912,53.638) 86.912,52.984
  Bottom Layer w0.381: U2.4@80.672,65.957 cw(c80.672,65.451) 81.029,65.808 ; U2.4@80.672,66.166 83.846,62.992 84.974,62.992 90.08,57.886 v1(90.08,52.984)
  Bottom Layer w0.508: U1.3@83.174,54.754 85.2,54.754 ; U1.3@84.867,54.57 cw(c85.2,54.361) 85.2,54.754 ; U1.3@84.867,54.938 ccw(c85.2,55.147) 85.2,54.754 ; R7.1@86.211,43.083 ccw(c85.851,43.443) 86.36,43.443 ccw(c86.869,43.443) R7.1@86.509,43.083 ; R7.1@86.36,42.934 v1(86.36,53.086) 86.36,53.594 85.2,54.754
NetR8_1: R8.1 U1.5 | length 9.5
  Top Layer w0.508: R8.1@107.208,57.759 ccw(c108.074,58.244) 108.074,57.252 ; R8.1@107.442,57.904 108.094,57.252 v1(108.941,57.252) cw(c108.941,58.73) R8.1@107.651,58.007 ; R8.1@107.467,57.693 cw(c107.467,57.244) R8.1@107.785,57.561 ; R8.1@107.678,57.904 ccw(c108.248,57.904) R8.1@107.845,57.501
  Bottom Layer w0.508: U1.5@105.974,57.254 v1@108.966,57.254 ; U1.5@107.619,57.009 cw(c108.209,56.419) 108.209,57.254 cw(c108.209,58.089) U1.5@107.619,57.499
NetR8_2: R8.2 U1.4 | length 6
  Top Layer w0.508: R8.2@107.442,59.444 107.79,59.792 v1(108.915,59.792) ; R8.2@107.616,59.295 cw(c108.816,58.095) v1@108.816,59.792
  Bottom Layer w0.508: U1.4@105.974,59.854 106.074,59.754 v1@108.966,59.754
NetR24_1: R24.1 R26.2 U6.5 | length 9.1
  Top Layer w0.762: U6.5@56.191,61.367 56.191,58.896 ; U6.5@56.26,59.417 ccw(c57.686,59.417) 56.678,58.41 ; R24.1@56.744,57.532 ccw(c54.857,57.562) 56.191,58.896 ; R26.2@59.131,57.548 56.871,57.548 R24.1@56.828,57.506 56.828,58.26 56.191,58.896
NRST: Bt1.2 C33.1 D8.1 R35.2 U8.7 | length 33.6
  Top Layer w0.254: U8.7@50.038,31.258 51.654,31.258 v1(52.324,31.928) v1@52.407,32.011 ; v1@52.134,31.928 cw(c51.674,31.928) 51.999,31.603 cw(c52.324,31.278) v1@52.324,31.738
  Top Layer w0.508: C33.1@49.259,19.837 50.814,19.837 D8.1@51.054,19.597 ; C33.1@49.408,19.688 cw(c49.768,19.328) 49.768,19.837 cw(c49.768,20.347) C33.1@49.408,19.987 ; 50.291,19.837 cw(c50.291,18.919) D8.1@50.94,19.568 ; D8.1@50.94,19.398 cw(c50.167,18.625) 51.26,18.625 ; Bt1.2@51.016,16.577 ccw(c50.425,17.168) 51.26,17.168 ccw(c52.096,17.168) Bt1.2@51.505,16.577 ; Bt1.2@51.26,16.332 51.26,19.391 D8.1@51.054,19.597 ; 52.276,19.597 ccw(c52.276,20.536) R35.2@52.941,19.874 ; v1(52.324,25.619) 54.312,23.631 54.312,20.606 53.789,20.083 R35.2@52.756,20.083 52.27,19.597 D8.1@51.054,19.597 ; R35.2@52.353,19.681 ccw(c51.95,20.083) R35.2@52.52,20.083 ; R35.2@52.413,19.741 cw(c52.731,19.423) R35.2@52.731,19.872 ; R35.2@52.581,20.232 cw(c51.054,21.751) D8.1@51.054,19.597 ; R35.2@52.93,19.934 cw(c53.29,19.574) 53.29,20.083 cw(c53.29,20.593) R35.2@52.93,20.233
  Bottom Layer w0.254: v1@52.189,25.754 ccw(c51.864,26.079) 52.324,26.079 ccw(c52.784,26.079) v1@52.459,25.754 ; v1@52.189,31.794 cw(c51.864,31.468) 52.324,31.468 cw(c52.784,31.468) v1@52.459,31.794 ; v1(52.324,25.619) v1(52.324,31.928)
O1: C42.2 J8.2 R39.1 U9.16 | length 28.4
  Top Layer w0.508: 7.757,48.067 cw(c8.341,47.484) J8.2@8.341,48.309 ; J8.2@9.881,48.565 8.255,48.565 6.756,47.066 6.756,44.958 8.034,43.68 R39.1@16.016,43.68 C42.2@18.108,43.68 20.543,43.68 ; R39.1@15.842,43.531 ccw(c15.481,43.171) 15.481,43.68 ccw(c15.481,44.189) R39.1@15.842,43.829 ; R39.1@16.19,43.531 cw(c16.55,43.171) 16.55,43.68 cw(c16.55,44.189) R39.1@16.19,43.829 ; C42.2@17.934,43.531 ccw(c17.573,43.171) 17.573,43.68 ccw(c17.573,44.189) C42.2@17.934,43.829 ; C42.2@18.282,43.531 cw(c18.642,43.171) 18.642,43.68 cw(c18.642,44.189) C42.2@18.282,43.829 ; U9.16@20.954,45.065 cw(c19.471,44.752) 20.543,43.68 ; 21.205,44.342 ccw(c20.565,44.983) U9.16@21.451,45.17 ; U9.16@21.948,45.085 20.543,43.68